# Altium PCB PCB2.PcbDoc
Units mil, origin at the board's own origin, x right, y up, seen from the top; angles counter-clockwise.
Board outline 1149.6 x 672.48 mil, 4 copper layers (Component Side, Ground Plane, Power Plane, Solder Side), stack 33.234 mil thick; 48 components, 45 nets, 195 pads, 94 vias.
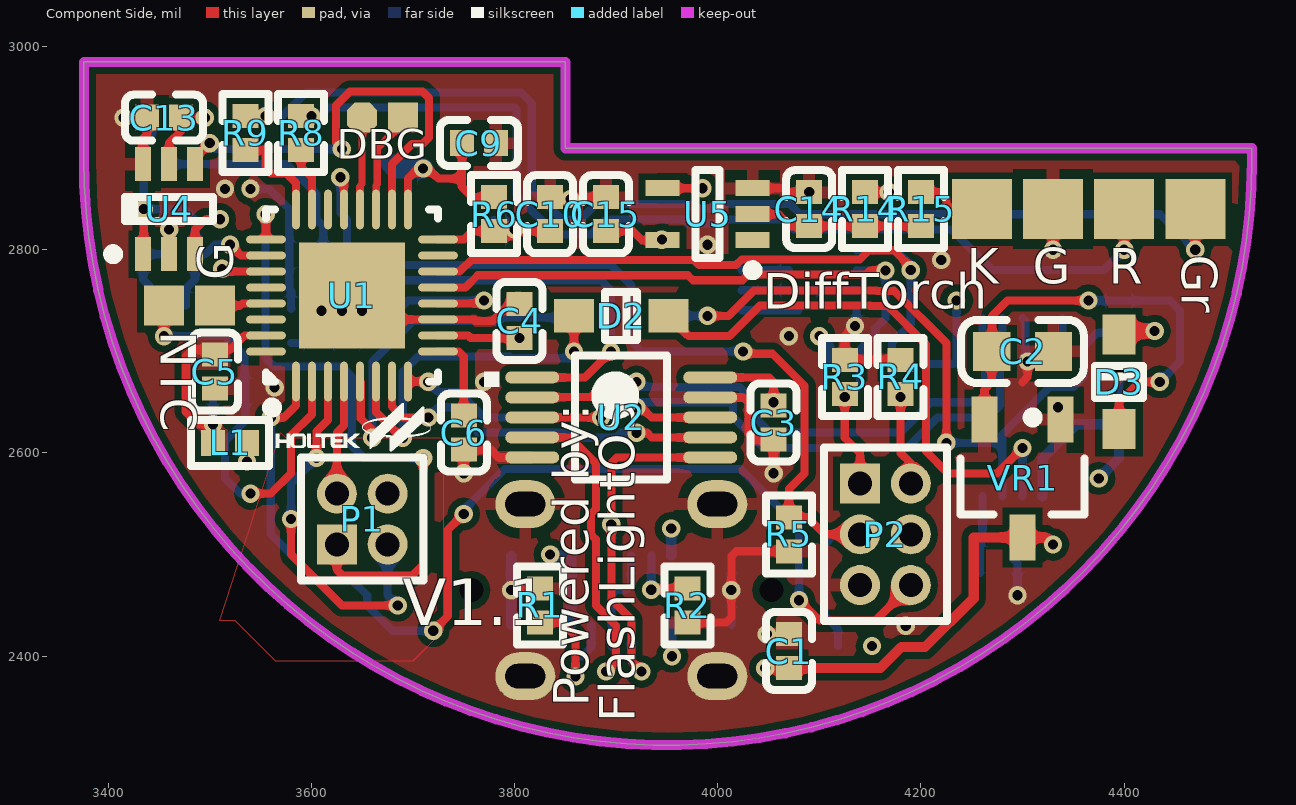
[diagram p0: Component Side view]
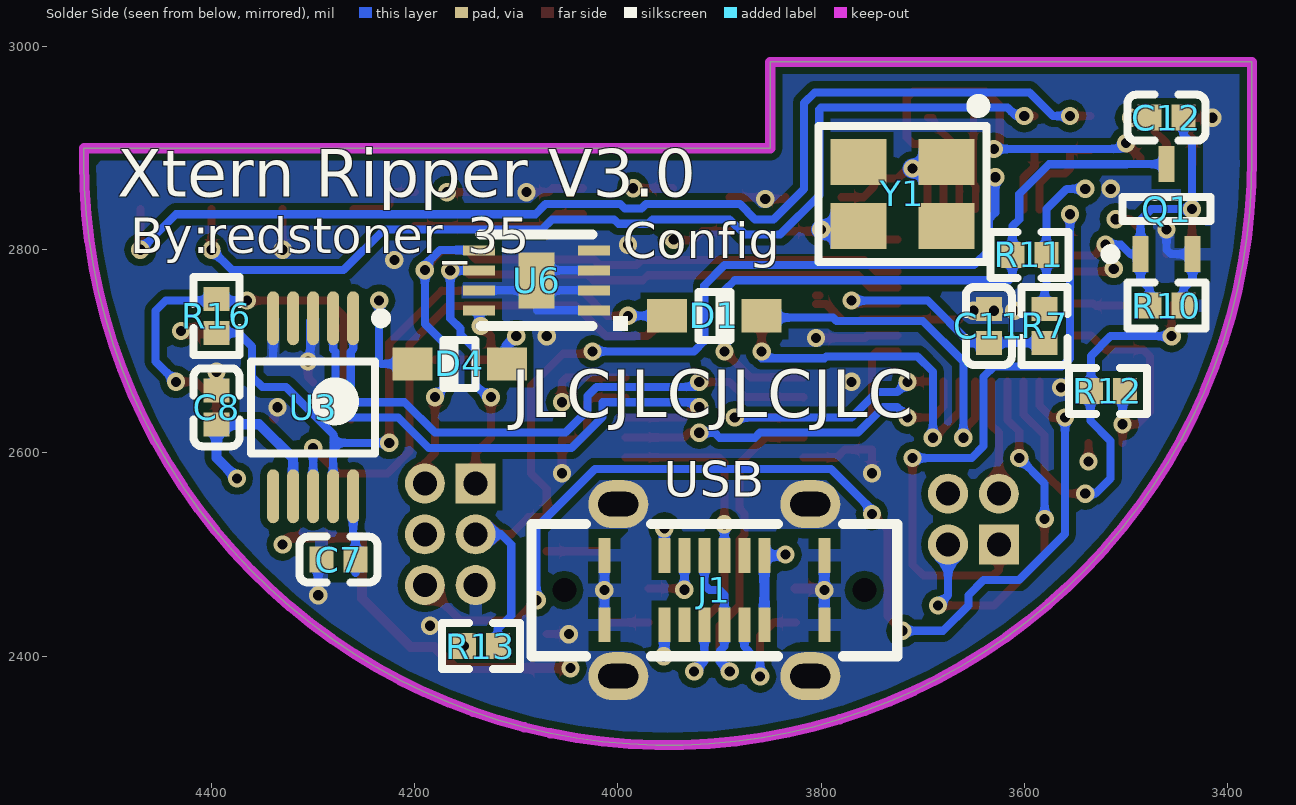
[diagram p1: Solder Side view, seen from below]
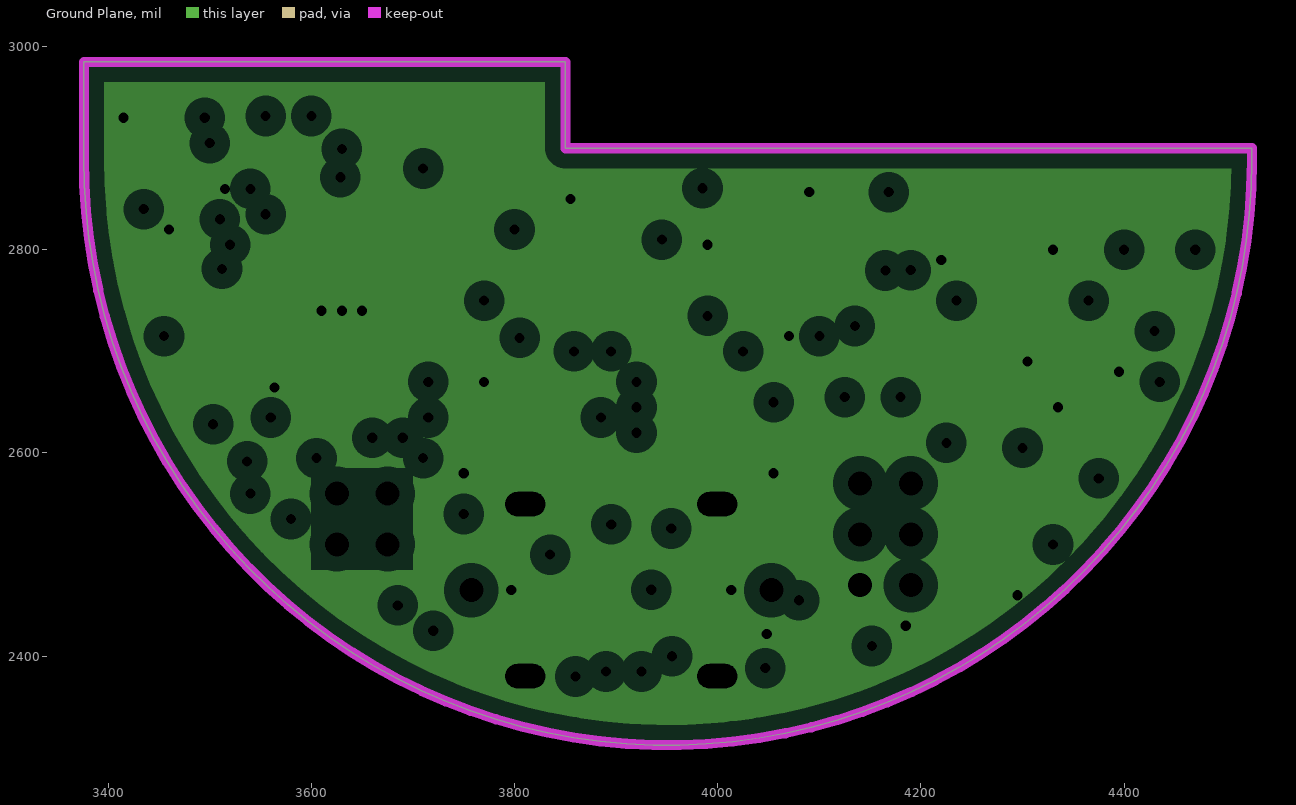
[diagram p2: Ground Plane, clearances drawn from the general rule]
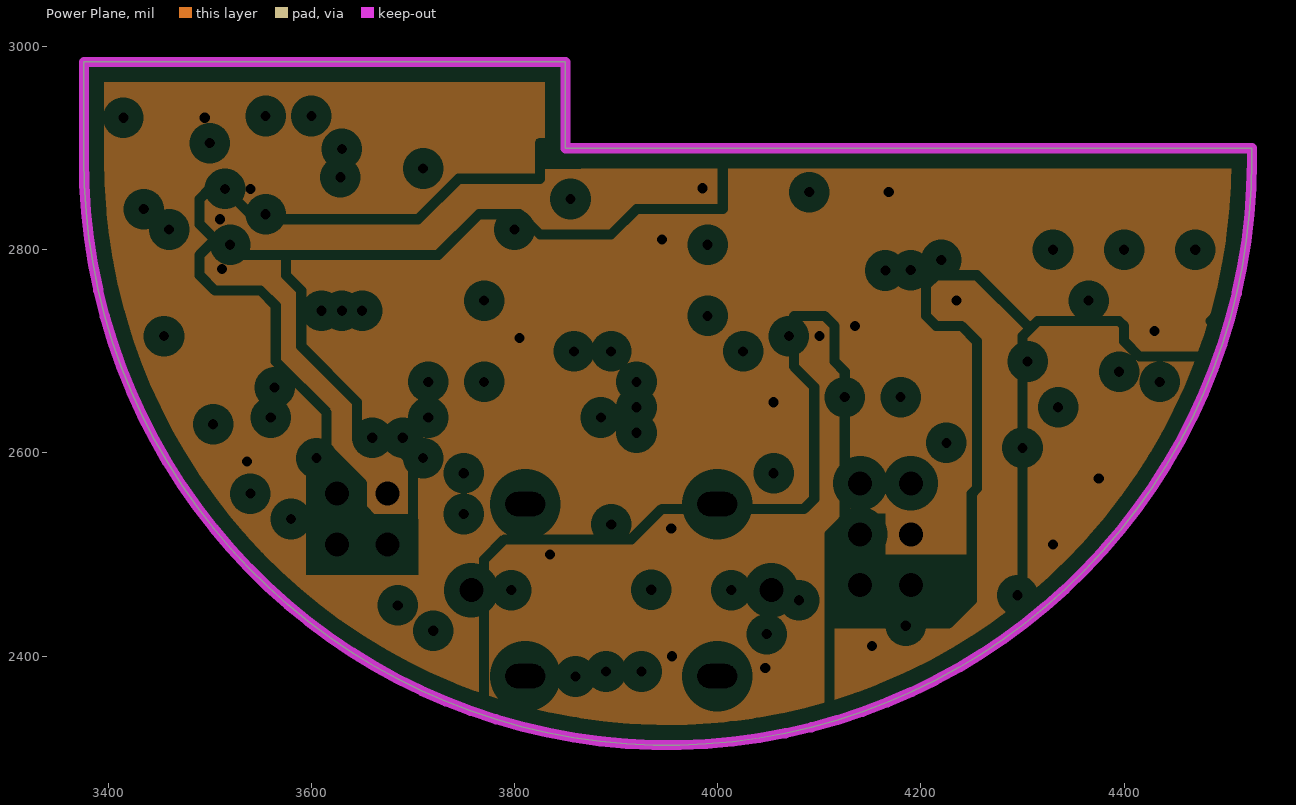
[diagram p3: Power Plane, clearances drawn from the general rule]
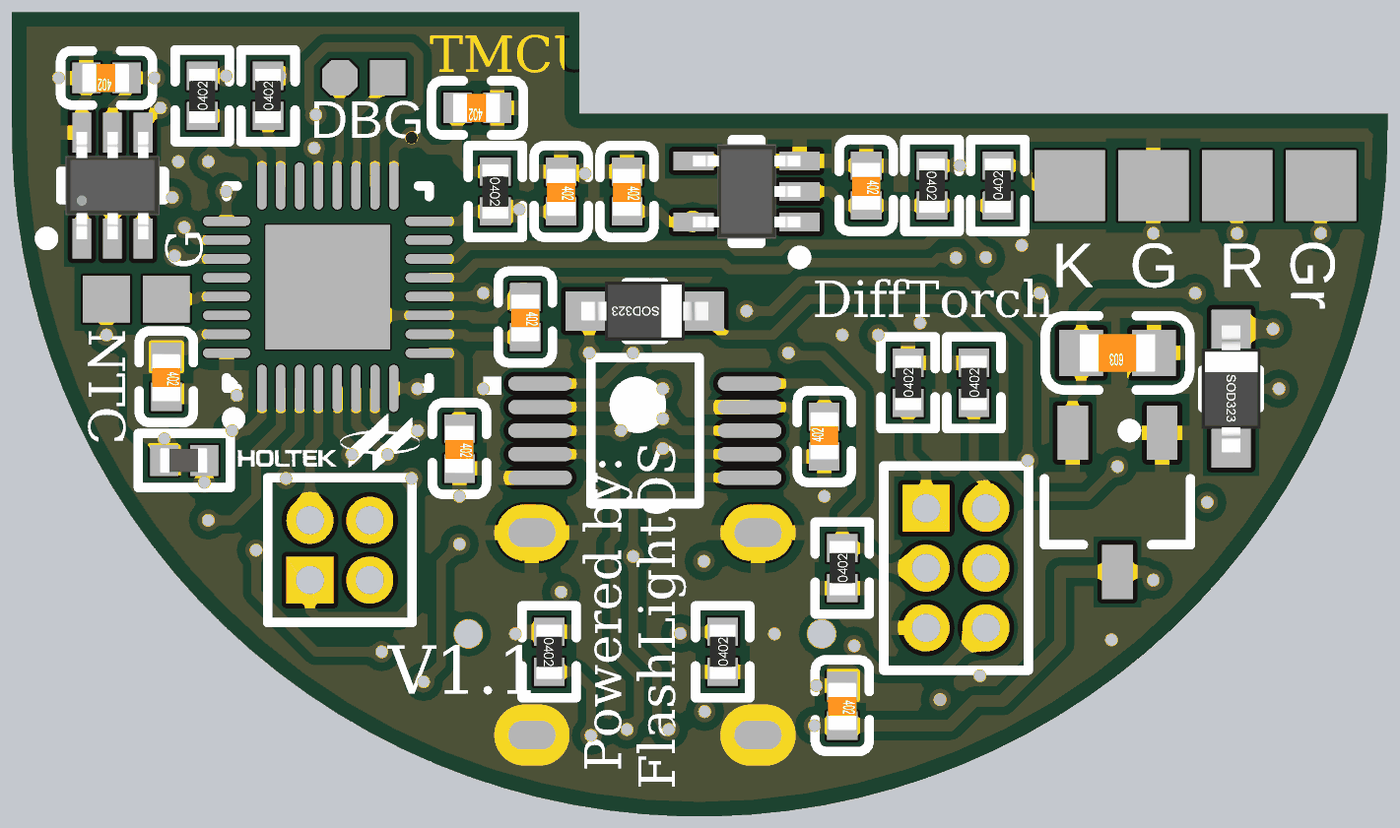
[diagram p4: 3D render of the assembled board from above, using the file's embedded part models]
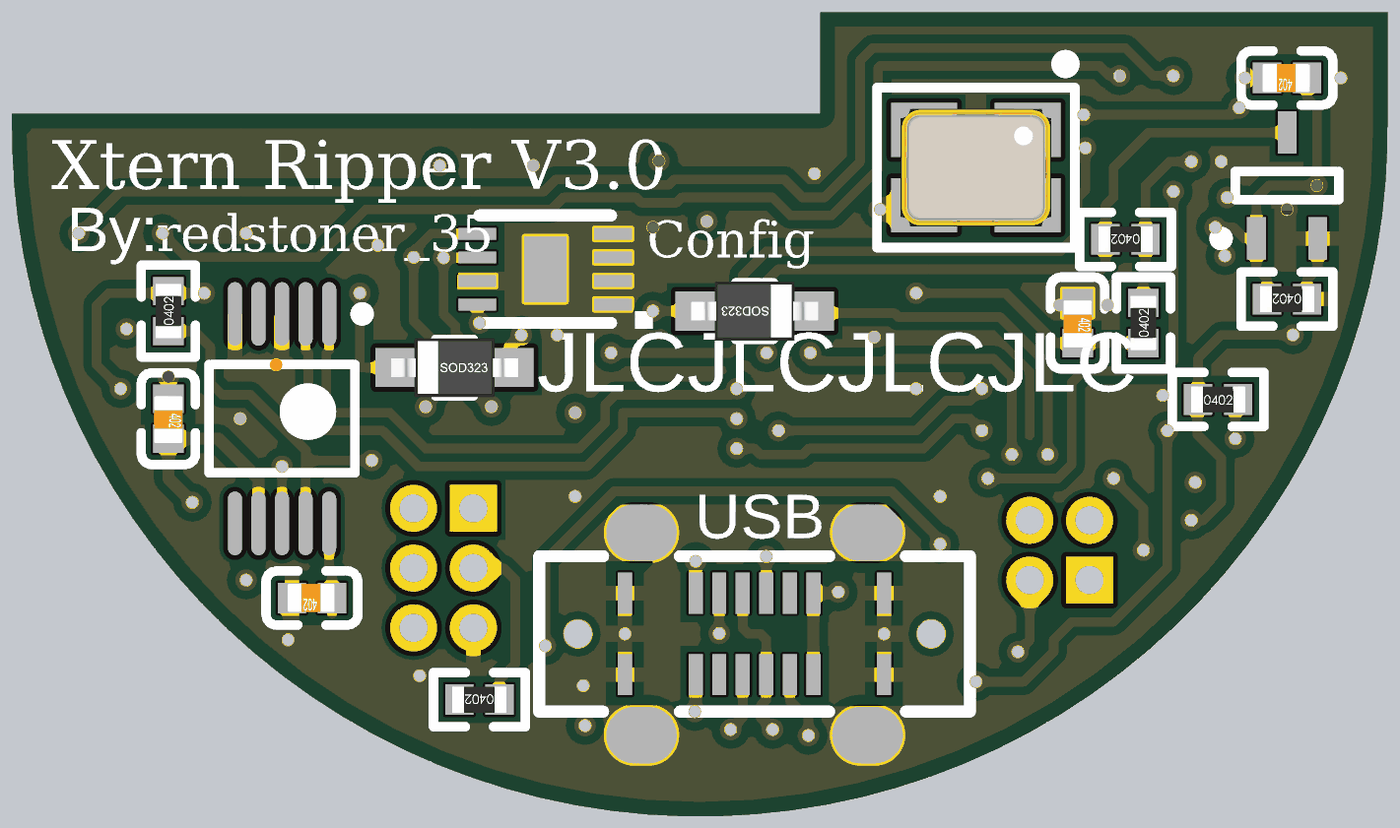
[diagram p5: 3D render of the assembled board from below, using the file's embedded part models]

## Layer stack, top to bottom
Top Solder: solder mask 0.4, Solder Resist, Dk 3.5
Component Side: signal copper 1.4
Dielectric 1: core 12.6, FR-4, Dk 4.8
Ground Plane: plane copper 1.417
Dielectric 3: prepreg 5, Dk 4.2
Power Plane: plane copper 1.417
Dielectric 4: core 10, Dk 4.2
Solder Side: signal copper 1.4
Bottom Solder: solder mask 0.4, Solder Resist, Dk 3.5

## Board outline
3376.06,2889.99 ccw(c3950.86,2887.2) 4525.66,2887.2 4525.66,2900 3850.07,2900 3850.07,2985 3376.06,2985

## Design rules (kind name [scope] priority, off if disabled: settings)
Clearance [All] p1: gap=7
DiffPairsRouting [All] p1: maxlimit=8 minlimit=7 mostfreqgap=7 toplayer_minwidth=8 toplayer_maxwidth=9 toplayer_prefwidth=8 bottomlayer_minwidth=8 bottomlayer_maxwidth=9 bottomlayer_prefwidth=8 maxuncoupledlength=500
PlaneClearance [All] p1: clearance=15
PlaneConnect [All] p1: planeconnectstyle=Direct reliefexpansion=20 reliefentries=4 reliefconductorwidth=10 reliefairgap=10
PolygonConnect PolygonConnect_1 [IsVia] p1: connectstyle=Direct reliefconductorwidth=10 reliefentries=4 polygonreliefangle="90 Angle" airgapwidth=10
PolygonConnect [All] p2: connectstyle=Relief reliefconductorwidth=12 reliefentries=4 polygonreliefangle="90 Angle" airgapwidth=10
RoomDefinition main [InComponentClass('main')] p1: confinementstyle=ConfineIn formatcopy=TRUE lockcomponents=FALSE outline 0,0 2000,0 2000,1000 0,1000
RoutingVias [All] p1: holewidth=28 width=50 viastyle="Through Hole" minholewidth=28 minwidth=50 maxholewidth=28 maxwidth=50
SolderMaskExpansion [All] p1: expansion=4
Width [All] p1: maxlimit=200 minlimit=7 preferedwidth=10
27 further rules are at their usual default settings.

## Classes and differential pairs
differential pair USB: +USB_P -USB_N
differential pair MCUUSB: +MCUUSB_P -MCUUSB_N
differential pair UARTUSB: +UARTUSB_P -UARTUSB_N

## Components (designator, comment, footprint, x,y, rotation, side; value= is the part's Value field where it differs from the comment)
C1 "100nF (104) 10% 16V" 0402_C 4070,2405 r270 top
C2 "10uF (106) 10% 10V" 0603_C 4300,2700 r180 top
C3 "100nF (104) 10% 16V" 0402_C 4055,2630 r90 top
C4 "100nF (104) 10% 16V" 0402_C 3805,2730 r270 top
C5 "100nF (104) 10% 16V" 0402_C 3505,2680 r270 top
C6 "4.7uF (475) 20% 10V" 0402_C 3750,2620 r270 top
C7 "4.7uF (475) 20% 10V" 0402_C 4275,2495 r0 bottom
C8 "100nF (104) 10% 16V" 0402_C 4395,2645 r270 bottom
C9 "15pF (150) 5% 50V" 0402_C 3765,2905 r180 top
C10 "15pF (150) 5% 50V" 0402_C 3835,2835 r270 top
C11 "1.0uF (105) 10% 25V" 0402_C 3635,2725 r270 bottom
C12 "470nF (474) 10% 10V" 0402_C 3460,2930 r0 bottom
C13 "100nF (104) 10% 16V" 0402_C 3455,2930 r180 top
C14 "470nF (474) 10% 10V" 0402_C 4090,2840 r270 top
C15 "100nF (104) 10% 16V" 0402_C 3890,2835 r270 top
D1 "1N4148WS T4" SOD-323 3905,2735 r0 bottom
D2 "1N4148WS T4" SOD-323 3905,2735 r180 top
D3 "1N5819W S4" SOD-323 4395,2670 r270 top
D4 "1N4148WS T4" SOD-323 4155.86,2687.71 r180 bottom
J1 "Typec-303-ACP16" USB-C-SMD_TYPEC-303-ACP16 3905.07,2465 r0 bottom locked
L1 "500Ω 5%" 0402_L 3520,2610 r180 top
P1 "1.27mm 2P双排针" MHDR2X2 3625.07,2510 r0 top locked
P2 "1.27mm 3P双排针" MHDR2X3 4140.07,2570 r270 top locked
Q1 "2N7002KW" SC70-3 3460,2840 r90 bottom
R1 "5.1KΩ (5101) ±1%" 0402_R 3825,2450 r270 top
R2 "5.1KΩ (5101) ±1%" 0402_R 3970,2450 r90 top
R3 "3.3KΩ (3301) ±1%" 0402_R 4125,2675 r90 top
R4 "3.3KΩ (3301) ±1%" 0402_R 4180,2675 r90 top
R5 "10KΩ (1002) ±1%" 0402_R 4070,2520 r90 top
R6 "1MΩ (1004) ±1%" 0402_R 3780,2835 r270 top
R7 "82KΩ (8202) ±1%" 0402_R 3580,2725 r90 bottom
R8 "22Ω (22R0) ±1%" 0402_R 3590,2915 r90 top
R9 "22Ω (22R0) ±1%" 0402_R 3535,2915 r90 top
R10 "82KΩ (8202) ±1%" 0402_R 3460,2745 r0 bottom
R11 "82KΩ (8202) ±1%" 0402_R 3595,2795 r0 bottom
R12 "10KΩ (1002) ±1%" 0402_R 3517.64,2661.03 r180 bottom
R13 "2.7KΩ (2701) ±1%" 0402_R 4135,2410 r0 bottom
R14 "15KΩ (1502) ±1%" 0402_R 4145,2840 r270 top
R15 "1KΩ (1001) ±1%" 0402_R 4200,2840 r90 top
R16 "10KΩ (1002) ±1%" 0402_R 4395,2735 r90 bottom
U1 "HT32F52352-QFN" QFN32-HT32 3640,2755 r90 top locked
U2 "TS3USB30E/CH442E" MSOP-10 3905,2635 r0 top locked
U3 "CH340E" MSOP-10 4300,2645 r270 bottom
U4 "SN74LVC1G373DCKR" DCK0006A_N 3460,2840 r90 top
U5 "SN74LVC1G17DCKR" DCK0005A_N 3990,2835 r180 top
U6 "FM24C512D-UD-T-G" UDFN-8 4080,2770 r0 bottom
VR1 "XC6206P332MR" SOT-23-3L 4300,2575 r90 top locked
Y1 "8MHZ 20PF 10PPM" SMD-3225_4P 3720,2855 r0 bottom locked

## Footprints (in the part's own frame and the unit in brackets; to place one, negate y for a bottom-side part, rotate by r counter-clockwise, add the part's x,y. Pads: shape width x height; smd on the part's side, far side on the other; paste and mask are expansions set on the pad)
0402_C [mm]
  rect 0.6x0.65 smd mask+0.051: 1(-0.425,0) 2(0.425,0)
  silkscreen extent -0.97,-0.58 0.97,0.58, body extent -0.48,-0.3 0.52,0.3, height 0.2
0402_L [mm]
  rect 0.6x0.65 smd mask+0.051: 1(-0.425,0) 2(0.425,0)
  silkscreen extent -0.97,-0.58 0.97,0.58, body extent -0.51,-0.26 0.54,0.26, height 0.36
0402_R [mm]
  rect 0.6x0.65 smd mask+0.051: 1(-0.425,0) 2(0.425,0)
  silkscreen extent -0.97,-0.58 0.97,0.58, body extent -0.57,-0.27 0.58,0.28, height 0.41
0603_C [mm]
  rect 0.93x0.98 smd: 1(-0.77,0) 2(0.77,0)
  silkscreen extent -1.53,-0.79 1.54,0.79, body extent -0.8,-0.4 0.8,0.4, height 0.3
DCK0005A_N [mm] "SOT23, 5-Leads, Body 2.15x1.4mm, Pitch 0.65mm, IPC Medium Density"
  rect 0.85x0.4 smd: 1(-1.125,0.65) 2(-1.125,0) 3(-1.125,-0.65) 4(1.125,-0.65) 5(1.125,0.65)
  silkscreen extent -1.25,-1.1 0.3,1.52, body extent -1.14,-1 1.14,1, height 1.1
DCK0006A_N [mm] "SOT23, 6-Leads, Body 2.15x1.4mm, Pitch 0.65mm, IPC Medium Density"
  rect 0.85x0.4 smd: 1(-1.125,0.65) 2(-1.125,0) 3(-1.125,-0.65) 4(1.125,-0.65) 5(1.125,0) 6(1.125,0.65)
  silkscreen extent -1.25,-1.1 0.3,1.52, body extent -1.14,-1 1.14,1, height 1.1
MHDR2X2 [mm] "Connector; Header; 2x2 Position"
  rect 1x1 hole 0.6: 1(0,0)
  round 1 hole 0.6: 2(0,1.27) 3(1.27,0) 4(1.27,1.27)
  silkscreen extent -0.9,-0.9 2.17,2.17
MHDR2X3 [mm] "Connector; Header; 3x2 Position"
  rect 1x1 hole 0.6: 1(0,0)
  round 1 hole 0.6: 2(0,1.27) 3(1.27,0) 4(1.27,1.27) 5(2.54,0) 6(2.54,1.27)
  silkscreen extent -0.9,-0.9 3.44,2.17
MSOP-10 [mm] "TSSOP, 10-Leads, Body 3.00x3.00mm, Pitch 0.50mm, IPC Medium Density"
  oval 1.35x0.3 smd: 1(-2.225,1) 2(-2.225,0.5) 3(-2.225,0) 4(-2.225,-0.5) 5(-2.225,-1) 6(2.225,-1) 7(2.225,-0.5) 8(2.225,0) 9(2.225,0.5) 10(2.225,1)
  silkscreen extent -1.15,-1.55 1.15,1.55, body extent -1.55,-1.55 1.55,1.55, height 1.1
QFN32-HT32 [mm] "QFN, 32-Leads, Body 4.00x4.00mm, Pitch 0.40mm, Thermal Pad 2.65x2.65mm, IPC Low Density"
  oval 1x0.2 smd mask+0.03: 1(-2.15,1.4) 2(-2.15,1) 3(-2.15,0.6) 4(-2.15,0.2) 5(-2.15,-0.2) 6(-2.15,-0.6) 7(-2.15,-1) 8(-2.15,-1.4) 17(2.15,-1.4) 18(2.15,-1) 19(2.15,-0.6) 20(2.15,-0.2) 21(2.15,0.2) 22(2.15,0.6) 23(2.15,1) 24(2.15,1.4)
  oval 0.2x1 smd mask+0.03: 9(-1.4,-2.15) 10(-1,-2.15) 11(-0.6,-2.15) 12(-0.2,-2.15) 13(0.2,-2.15) 14(0.6,-2.15) 15(1,-2.15) 16(1.4,-2.15) 25(1.4,2.15) 26(1,2.15) 27(0.6,2.15) 28(0.2,2.15) 29(-0.2,2.15) 30(-0.6,2.15) 31(-1,2.15) 32(-1.4,2.15)
  rect 2.65x2.65 smd mask+0.03: 33(0,0)
  silkscreen extent -2.92,-2.15 2.15,2.15, body extent -2,-2 2,2, height 0.8
SC70-3 [mm] "3 Lead SC70(SOT-323) package for small Transistor"
  rect 0.9x0.4 smd mask+0.05: 1(-1.125,0.65) 2(-1.125,-0.65) 3(1.125,0)
  silkscreen extent -1.25,-1.1 0.3,1.53, body extent -0.67,-1.1 0.67,1.1, height 1.1
SMD-3225_4P [mm]
  rect 1.4x1.15 smd: 1(-1.1,-0.8) 2(1.1,-0.8) 3(1.1,0.8) 4(-1.1,0.8)
  silkscreen extent -2.1,-2.35 2.1,1.7, body extent -1.6,-1.25 1.6,1.25, height 0.61
SOD-323 [mm]
  rect 1x0.83 smd: 1(1.18,0) 2(-1.18,0)
  silkscreen extent -0.4,-0.6 0.4,0.6, body extent -1.35,-0.62 1.35,0.62, height 1.1
SOT-23-3L [mm] "http://www.aosmd.com/res/packaging_information/SOT-23-3L.pdf"
  rect 1.15x0.65 smd: 1(1.475,-0.95) 2(1.475,0.95) 3(-1.475,0)
  silkscreen extent -0.9,-1.55 1.65,1.55, body extent -0.9,-1.55 0.9,1.55, height 1.25
UDFN-8 [mm] "SON, 8-Leads, Body 2.00x3.00mm, Pitch 0.50mm, Thermal Pad 1.40x0.90mm, IPC Medium Density"
  rect 0.8x0.25 smd mask+0.05: 1(-1.44,0.75) 2(-1.44,0.25) 3(-1.44,-0.25) 4(-1.44,-0.75) 5(1.44,-0.75) 6(1.44,-0.25) 7(1.44,0.25) 8(1.44,0.75)
  rect 0.9x1.4 smd mask+0.05: 9(0,0)
  silkscreen extent -2.1,-1.14 1.4,1.14, body extent -1.5,-1 1.5,1, height 0.55
USB-C-SMD_TYPEC-303-ACP16 [mm]
  rect 0.1x0.1 hole 0.6 mask+0.05: 0(-3.75,0) 0(3.75,0)
  oval 1.5x1.2 hole 0.61 slot 1 at 0 deg mask+0.051: 1(-2.4,-2.15) 1(-2.4,2.15) 1(2.4,-2.15) 1(2.4,2.15)
  rect 0.3x0.87 smd paste-100 mask+0.051: A1(-2.75,0.865) A4(-1.25,0.865) A5(-0.75,0.865) A6(-0.25,0.865) A7(0.25,0.865) A8(0.75,0.865) A9(1.25,0.865) A12(2.75,0.865) B1(2.75,-0.865) B4(1.25,-0.865) B5(0.75,-0.865) B6(0.25,-0.865) B7(-0.25,-0.865) B8(-0.75,-0.865) B9(-1.25,-0.865) B12(-2.75,-0.865)
  silkscreen extent -4.57,-1.65 4.57,1.65

## Part data
C1 C3 C4 C5 C8 C13 C15: library part "0402 100nF (104) 10% 16V", "贴片电容"
C2: library part "0603 10uF (106) 10% 10V", "贴片电容"
C6 C7: library part "0402 4.7uF (475) 20% 10V", "贴片电容"
C9 C10: library part "0402 15pF (150) 5% 50V", "贴片电容"
C11: library part "0402 1.0uF (105) 10% 25V", "贴片电容"
C12 C14: library part "0402 470nF (474) 10% 10V", "贴片电容"
D1 D2 D3 D4: library part "SOD-323 1N4148WS T4", "二极管"
J1: library part Type-303-ACP16, "16Pin TypeC 立贴母座"
L1: library part "0402 10nH 5%", "贴片磁珠"
P1: library part MHDR2X2, "Header, 2-Pin, Dual row"
P2: library part MHDR2X3, "Header, 3-Pin, Dual row"
Q1: library part "2N7002 7002", "MOS(场效应管)"
R1 R2: library part "0402 5.1KΩ (5101) 1%", "贴片电阻"
R3 R4 R13: library part "0402 3.3KΩ (3301) 1%", "贴片电阻"
R5 R12 R16: library part "0402 10KΩ (1002) 1%", "贴片电阻"
R6: library part "0402 1MΩ (1004) 1%", "贴片电阻"
R7 R10: library part "0402 68KΩ (6802) 1%", "贴片电阻"
R8 R9: library part "0402 22Ω (22R0) 1%", "贴片电阻"
R11: library part "0402 100KΩ (1003) 1%", "贴片电阻"
R14: library part "0402 15KΩ (1502) 1%", "贴片电阻"
R15: library part "0402 1KΩ (1001) 1%", "贴片电阻"
U1: "Holtek MCU Cortex M0+ 48MHz 128K ROM 16K RAM"
U2: library part TS3USB30E, "Passive SPDT USB2.0 Highspeed switch"
U3: "USB-TTL UART converter MSOP-10"
U4: "Single D-Type Latch with 3S Output, DCK0006A, LARGE T&R"
U5: "Single Schmitt-Trigger Buffer, DCK0005A, LARGE T&R"
U6: library part CAT24C512HU5, "512Kbit 24Serires I2C EEPROM UDFN-8 with UID and OTP Sector"
VR1: library part "SOT-23 XC6206P332MR", "低压差线性稳压(LDO)"
Y1: library part "SMD-3225_4P  12MHZ 20PF 10PPM", "贴片晶振"

## Free pads (board coordinates)
  rect 39.37x39.37 smd mask+1.97: 0(3505,2745) 1(3455,2745)
  rect 59.06x59.06 smd mask+1.97: 2(4260,2840) 4(4330,2840) 5(4470,2840) 6(4400,2840)
  rect 29.53x29.53 smd mask+1.97: 7(3690,2930)
  oct 29.53x29.53 smd mask+1.97: 8(3650,2930)

## Via types
v1: diameter 18, hole 10, Component Side to Solder Side, tented both sides, 94 vias

## Nets (pads, with @x,y where several pads share a name; then routed paths per layer and width w, separated by ;. In a path a pad name is that pad's centre, name@x,y a point inside that pad or via, vN(x,y) a via of type N, cw(c..) or ccw(c..) an arc to the next point about the centre after c; other vN are vias at no path point)
3V3: C3.2 C4.2 C12.2 C13.1 C15.2 D3.2 L1.1 P2.4 R3.2 R4.2 R7.2 R11.1 R14.1 U1.10 U2.10 U4.5 U5.5 U6.8 | length 662.7
  Component Side w8: U4.5 3460,2905 3471.73,2916.73 C13.1 v1(3495,2930) ; v1(3536.73,2591.73) L1.1 ; U1.10 3754.37,2715.63 ; 3755,2715 3756.73,2713.27 v1(3805,2713.27) ; C15.2 3916.73,2818.27 3925.59,2809.41 U5.5 ; U2.10 4050.63,2674.37 4055,2670 C3.2 4051.73,2650 v1(4055,2650) ; v1(4135,2725) 4125,2715 R3.2 R4.2 ; R14.1 v1(4168.27,2856.73)
  Component Side w15: D3.2 4398.54,2720 v1(4430,2720)
  Solder Side w8: C12.2 v1(3495,2930) ; v1(3540,2860) 3558.28,2860 3578.27,2840.02 R11.1 3578.27,2761.73 3580,2760 R7.2 R7.2@3580.5,2742.23 ; v1@4136.69,2721.69 U6.8
  other v1: 3945,2810
5V: C1.2 C8.2 D4.1 J1.A4 J1.A9 J1.B4 J1.B9 U3.7 VR1.3 | length 752
  Component Side w10: v1(4046.73,2388.27) C1.2 C1.2 4160,2388.3 4180.7,2409 4204,2409 4251.93,2456.93 4251.93,2516.93 VR1.3 4323.07,2516.93 v1(4330,2510)
  Solder Side w10: v1@3835.94,2499.06 J1.B9 J1.A4 ; v1@3954.28,2400.72 J1.A9 ; J1.B4 v1(3954.28,2525.72) ; v1(4100,2715) 4109.41,2705.59 D4.1 ; U3.7 4319.69,2594.68 4353.27,2628.27 C8.2 ; v1(4375,2575) 4395,2595 C8.2 ; 4395,2615 C8.2
  other v1: 3955,2400 3835,2500
A3V3: C5.1 L1.2 R12.2 U1.31 | length 225.7
  Component Side w8: L1.2 v1(3503.27,2628.27) 3488.79,2628.27 3476.43,2640.63 3476.43,2694.89 3483.27,2701.73 3505,2701.73 3520.33,2701.73 3534.23,2715.63 U1.31
  Solder Side w8: R12.2 3503.27,2658.66 v1(3503.27,2628.27)
BOOT: U1.18 U4.4 | length 434.7
  Component Side w8: U4.4 3485.59,2890.59 v1(3500,2905) ; v1(3630,2899.24) 3630,2900 3624.24,2905.76 3624.24,2941.94 3638.06,2955.76 3709.32,2955.76 3715.76,2949.32 3715.76,2910.68 3709.32,2904.24 3699.24,2904.24 3679.37,2884.37 U1.18
  Solder Side w8: v1(3500,2905) 3505.76,2899.24 v1(3630,2899.24)
CH3V3: C7.1 U3.10 | length 76.6
  Solder Side w8: 4258.27,2481.73 C7.1 4258.27,2518.27 4260.63,2520.63 U3.10
DCDCEN: P1.4 U1.27 | length 44.4
  Component Side w8: v1(3511.99,2781.21) 3514.58,2778.62 U1.27
GND: C1.1 C2.1 C3.1 C4.1 C5.2 C6.2 C7.2 C8.1 C9.1 C10.1 C11.1 C13.2 C14.1 C15.1 J1.1 J1.A1 J1.A12 J1.B1 J1.B12 P2.5 pad.4 Q1.2 R1.1 R2.1 R5.1 R10.1 U1.11 U1.32 U1.33 U2.5 U2.9 U3.3 U3.5 U4.2 U4.6 U5.3 U6.1 U6.2 U6.3 U6.4 U6.7 U6.9 VR1.1 | length 1449.4
  Component Side w8: v1(3415,2930) C13.2 3438.27,2913.27 3434.41,2909.41 U4.6 ; U4.2 v1(3460,2820) ; C5.2@3505,2668.27 3503.27,2670 C5.2@3505,2670 ; U1.33@3663.62,2731.38 U1.11 3760.34,2731.38 3761.72,2730 3778.28,2730 3795.02,2746.73 C4.1 ; v1(3750,2580) C6.2 3776.73,2603.27 3784.37,2595.63 U2.5 ; C4.1@3801.73,2755 C4.1@3805,2755 ; C10.1 3836.73,2850 v1(3855,2850) ; v1@3856.73,2851.73 C15.1 ; R2.1 4008.27,2433.27 4013.34,2438.34 v1(4013.34,2465) 4013.34,2498.34 4018.27,2503.27 R5.1 ; U2.9 4025.31,2654.69 4030.17,2649.83 4030.17,2619.83 4036.73,2613.27 C3.1 v1(4055,2580) ; U5.3 4064.41,2860.59 4068.27,2856.73 v1(4090,2856.73) ; v1(4048.27,2421.73) C1.1 ; 4300,2669.68 4305,2674.68 v1(4305,2690) ; v1(4330,2800) pad.4 ; v1(4335,2645) 4335,2639.33 4339.33,2635 VR1.1
  Component Side w10: v1(3796.8,2465.01) 3798.53,2466.73 R1.1
  Solder Side w8: R10.1 3443.27,2761.73 3434.41,2770.59 Q1.2 3455.71,2795.71 3460,2800 v1(3460,2820) ; J1.A12 v1(4013.34,2465) J1.B1 ; U6.1 4079.53,2740.47 ; U6.2 U6.9@4070.16,2760.16 ; U6.3 U6.9@4070.16,2779.84 ; U6.9@4089.84,2760.16 U6.7 ; C7.2 4295,2491.73 v1(4295,2460) ; U3.3 4302.78,2729.82 4302.78,2692.22 v1(4305,2690) ; 4339.37,2695.65 U3.5 ; C8.1 v1(4395,2680)
  Solder Side w10: J1.A1 v1(3796.8,2465.01) J1.B12
  other v1: 4185,2430 3563.89,2664.47 3770,2670 4070,2715 3610,2740 3630,2740 3650,2740 4220,2790 3990,2805 3515,2860
GR: pad.5 R9.2 | length 1114.4
  Component Side w8: R9.2 v1(3555,2931.73) ; v1(4470,2800) pad.5
  Solder Side w8: v1(3555,2931.73) 3571.72,2931.73 3594.98,2955 3806.21,2955 3816.87,2944.35 3816.87,2859.85 3846.72,2830 3865,2830 3880,2845 3972.31,2845 3976.72,2840.59 3993.28,2840.59 3997.69,2845 4071.21,2845 4081.21,2835 4435,2835 v1(4470,2800)
GRLED: R9.1 U1.24 | length 100.1
  Component Side w8: R9.1 3555,2898.27 3555,2880 3560,2875 3575.5,2875 3584.88,2865.62 U1.24
KEYI: U4.3 U5.4 | length 92.1
  Component Side w8: U4.3 3485.59,2820 3495.59,2830 v1(3510,2830) ; U5.4 v1(3985,2860.59)
KEYIN: pad.2 R15.2 | length 69.9
  Component Side w8: R15.2 4218.27,2856.73 4225,2850 4225,2845 4230,2840 pad.2
KEYLOCK: C12.1 Q1.1 R10.2 U1.26 U4.1 | length 358.2
  Component Side w8: U4.1@3435,2796.3 v1(3435,2840) ; v1(3520,2805) 3530.63,2794.37 U1.26
  Solder Side w8: C12.1 3443.27,2913.27 3435,2905 v1(3435,2840) 3475,2840 3485.59,2829.41 Q1.1 ; R10.2 3476.73,2761.73 3485.59,2770.59 Q1.1 ; v1(3520,2805) 3505,2805 3495.71,2795.71 Q1.1
LEDEN: P1.1 U1.25 | length 623.8
  Component Side w8: U1.25 v1@3555.35,2834.65 ; P1.1 3625.07,2484.93 3630.69,2479.31 3699.31,2479.31 3710,2490 v1(3710,2595)
  Solder Side w8: v1(3555,2835) 3555,2693.11 3563.11,2685 3630,2685 3640,2675 3640,2606.72 3651.72,2595 v1(3710,2595)
LEDI: P1.3 U1.3 | length 370.2
  Component Side w8: v1@3580,2530 3580,2500 3630,2450 v1(3685,2450) ; v1(3605,2595) 3605,2621.21 3616.38,2632.59 U1.3
  Solder Side w8: v1(3580,2535) 3580,2570 v1(3605,2595) ; P1.3 3675.07,2459.93 v1(3685,2450)
LEDVF: P2.6 U1.1 | length 1080
  Component Side w8: v1(3560,2635) 3573.21,2635 3584.88,2646.67 U1.1 ; v1(3720,2425) 3734.62,2439.62 3734.62,2524.62 v1(3750,2540) ; v1(4080,2455) 4100,2435 4155.07,2435 P2.6
  Solder Side w8: v1(3560,2635) 3560,2520.15 3605.15,2475 3640,2475 3655,2460 3655,2450 3680,2425 v1(3720,2425) ; v1(3750,2540) 3750,2543.94 3790.34,2584.27 4022.44,2584.27 4080,2526.72 v1(4080,2455)
MCUUSB_N: U1.7 U2.7 | length 367.9
  Component Side w8: U1.7 3679.37,2645.63 3690,2635 v1(3715,2635) ; v1(3920,2620) 3930.32,2620 3935,2615.32 U2.7
  Solder Side w8: v1(3715,2635) 3725,2645 3738.79,2645 3763.79,2620 3860,2620 3865,2615 3900,2615 3905,2620 v1@3925,2620
MCUUSB_P: U1.8 U2.3 | length 271.6
  Component Side w8: U1.8 v1@3714.65,2670.35 ; U2.3 v1(3885,2635)
  Solder Side w8: v1(3715,2670) 3725,2660 3745,2660 3770,2635 v1(3885,2635)
NetC6_1: C6.1 U1.9 | length 85.6
  Component Side w8: U1.9 3745.12,2699.88 3750,2695 C6.1
NetC14_2: C14.2 R14.2 R15.1 U5.2 | length 170.6
  Component Side w8: U5.2 4060,2835 4071.73,2823.27 C14.2 R14.2 R15.1
NetD4_2: D4.2 R13.2 | length 93.6
  Solder Side w8: D4.2 4232.71,2687.71 4235,2690 v1(4235,2750)
  other v1: 4151.73,2410
NetJ1_A5: J1.A5 R1.2 | length 141.6
  Component Side w8: R1.2 3846.73,2433.27 3860,2420 v1(3860,2380)
  Solder Side w8: v1(3860,2380) 3860,2400 3866.27,2400 3875.54,2409.27 J1.A5
NetJ1_B5: J1.B5 R2.2 | length 67.7
  Component Side w8: v1@3935.94,2466.73 R2.2
  Solder Side w8: v1(3934.6,2465.4) J1.B5
NTC: pad.1 R12.1 U1.2 | length 438.7
  Component Side w8: v1(3455,2715) pad.1 ; v1(3540,2560) 3560,2560 3580,2580 3580,2617.43 3600.63,2638.06 U1.2
  Solder Side w8: v1(3455,2715) 3515,2715 3534.37,2695.63 R12.1 ; 3535,2675 3535,2631.72 3515,2611.72 3515,2575 3530,2560 v1(3540,2560)
PWMDIM: P2.3 R5.2 R13.1 U1.21 | length 1003.5
  Component Side w8: v1(3628.56,2871.44) 3632.13,2867.87 U1.21 ; v1(4025,2700) 4027.3,2697.7 4054.05,2697.7 4085.52,2666.23 4085.52,2580 4070,2564.48 R5.2 4088.27,2536.73 4105,2520 P2.3
  Solder Side w8: v1(3628.56,2871.44) 3628.56,2836.44 3635,2830 3635,2799.44 3649.44,2785 3895,2785 3915,2765 3915,2710 3925,2700 v1(4025,2700) ; R13.1 4118.27,2426.73 4105,2440 4105,2510 4115,2520 P2.3
RED: pad.6 R8.2 | length 993.6
  Component Side w8: R8.2 v1(3600,2931.73) ; v1(4400,2800) pad.6
  Solder Side w8: v1(3600,2931.73) 3608.27,2931.73 3616.54,2940 3800,2940 3801.87,2938.13 3801.87,2853.64 3840.5,2815 3875,2815 3890,2830 3966.09,2830 3970.5,2825.59 3999.5,2825.59 4003.91,2830 4065,2830 4075,2820 4230,2820 4270,2780 4380,2780 v1(4400,2800)
REDLED: R8.1 U1.23 | length 63
  Component Side w8: R8.1 3590,2881.72 3600.63,2871.09 U1.23
RST: C11.2 R7.1 U1.12 | length 253.8
  Component Side w8: U1.12 3767.13,2747.13 v1(3770,2750)
  Solder Side w8: R7.1 C11.2 3653.27,2708.27 3695,2750 v1(3770,2750)
RXD: D1.1 R16.1 U3.9 | length 691.8
  Component Side w8: v1(3990,2735) 4010.5,2735 4035.5,2760 4156.28,2760 4156.72,2759.56 4173.28,2759.56 4173.41,2759.69 4225,2708.11 v1(4225,2610)
  Solder Side w8: D1.1 v1(3990,2735) ; v1(4225,2610) 4280,2610 ; 4280,2596.4 4280,2618.28 4326.72,2665 4350,2665 4360,2675 4360,2705 4373.27,2718.27 R16.1 ; U3.9 4280.31,2594.69
SCL: P2.1 R3.1 U1.13 U6.6 | length 722.3
  Component Side w8: U1.13 3751.62,2762.87 3763.74,2775 3970.5,2775 3975.5,2770 4024.29,2770 4029.82,2775.54 4145.97,2775.54 4150,2779.56 v1(4165,2779.56) ; R3.1 4125,2615 4140.07,2599.93 P2.1
  Solder Side w8: v1(4125,2655) 4125,2651.72 4140.09,2666.81 4140.09,2701.81 4155,2716.72 4155,2722.55 4165,2732.55 v1@4165,2779.84 ; U6.6 4136.97,2779.56 v1(4165,2779.56)
SDA: P2.2 R4.1 U1.14 U6.5 | length 784.3
  Component Side w8: U1.14 3745.77,2778.62 3752.15,2785 3752.53,2785 3757.53,2790 3976.72,2790 3981.72,2785 4018.08,2785 4023.61,2790.54 4139.76,2790.54 4148.79,2799.56 4173.28,2799.56 4190,2782.85 v1(4190,2780) ; v1(4180,2655) R4.1 4180,2600 4190.07,2589.93 P2.2
  Solder Side w8: U6.5 4137.01,2799.84 4175.16,2799.84 4190,2785 4190,2726.96 4171.64,2708.6 4171.64,2663.36 v1(4180,2655)
SEL: Q1.3 R11.2 U2.1 | length 678.6
  Component Side w8: U2.1 3869.37,2674.37 v1(3895,2700)
  Solder Side w8: Q1.3 3499.5,2884.29 3499.55,2884.24 3575.76,2884.24 3605,2855 3605,2830 3611.73,2823.27 R11.2 3611.73,2773.27 3615,2770 3885,2770 3895,2760 v1(3895,2700)
SPSTEMP: P1.2 U1.4 | length 113.3
  Component Side w8: P1.2 3625.07,2620.07 3632.13,2627.13 U1.4
SWCLK: pad.7 U1.19 | length 105.8
  Component Side w7: U1.19 3664,2840.02 3664,2864 3664.87,2864.87 3664.87,2900.49 3665.49,2900.49 3685,2920 pad.7 pad.7@3695,2930
SWDIO: pad.8 U1.20 | length 91.2
  Component Side w7: U1.20 3647.87,2862.87 3650,2865 pad.8
TSENEN: pad.0 U1.29 | length 51.2
  Component Side w8: pad.0 3530,2745 3532.13,2747.13 U1.29
TXD: D2.2 U3.8 | length 557.2
  Component Side w8: D2.2 3971.46,2715 4011.72,2715 4041.72,2745 4150.07,2745 4150.5,2744.56 4167.33,2744.56 4205,2706.89 4205,2601.72 4226.72,2580 4275,2580 v1(4300,2605)
  Solder Side w8: U3.8 v1(4300,2605)
UART_MISO: D1.2 U1.5 | length 352.6
  Component Side w8: U1.5 3648.62,2669.61 3648.62,2633.95 3660,2622.57 v1(3660,2615)
  Solder Side w8: v1(3660,2615) 3660,2690 3700,2730 3785,2730 3788.27,2733.27 3856.81,2733.27 D1.2
UART_MOSI: D2.1 U1.6 | length 349.2
  Component Side w8: U1.6 3663.62,2640.16 3688.79,2615 v1(3690,2615) ; v1(3858.54,2700) D2.1
  Solder Side w8: v1(3690,2615) 3690,2680 3705,2695 3794.98,2695 3796.72,2693.27 3858.54,2693.27 v1(3858.54,2700)
UARTUSB_N: U2.8 U3.2 | length 568
  Component Side w8: v1(3920,2645) 3925,2645 3935,2635 U2.8
  Solder Side w8: v1(3920,2645) 3925,2650 4015,2650 4015,2635.5 4045.5,2605 4186.21,2605 4216.21,2635 4266.21,2635 4277.97,2646.76 4277.97,2699.68 4280.31,2702.02 U3.2
UARTUSB_P: U2.2 U3.1 | length 575.6
  Component Side w8: U2.2 3817.4,2655 3875,2655 3890,2670 v1(3920,2670)
  Solder Side w8: v1(3920,2670) 3925,2665 4021.21,2665 4030,2656.21 4030,2641.72 4051.72,2620 4180,2620 4210,2650 4260,2650 4262.97,2652.97 4262.97,2699.68 4260.63,2702.02 U3.1
USB_N: J1.A7 J1.B7 U2.6 | length 398
  Component Side w8: v1(3925,2385) 3915,2395 3915,2436.21 3895.23,2455.98 v1(3895.23,2529.77) 3895.23,2590.23 3900.63,2595.63 U2.6
  Solder Side w8: J1.B7 v1(3895.23,2529.77) ; J1.A7 3914.91,2395.09 v1(3925,2385)
USB_P: J1.A6 J1.B6 U2.4 | length 428.8
  Component Side w8: U2.4 3854.68,2615.32 3880.23,2589.77 3880.23,2547.79 ; 3880.21,2511.77 3880.21,2512.68 3880.14,2512.75 3880.14,2513.56 3880.03,2513.68 3880.03,2514.39 3879.86,2514.55 3879.86,2515.14 3875.23,2519.77 3875.23,2540.23 3879.86,2544.86 3879.86,2544.98 3880.03,2545.15 3880.03,2545.86 3880.14,2545.98 3880.14,2546.79 3880.21,2546.86 3880.21,2547.76 ; 3880.23,2511.75 3880.23,2449.77 3900,2430 3900,2395 v1(3890,2385)
  Solder Side w8: v1(3890,2385) 3899.91,2394.91 3899.91,2401.39 3899.89,2402.91 3899.63,2403.18 3899.63,2405.37 3895.23,2409.77 J1.A6 3895.23,2460.23 3900,2465 3910,2465 3914.91,2469.91 J1.B6
V33A: C2.2 D3.1 R16.2 VR1.2 | length 452.9
  Component Side w8: VR1.2 4262.6,2662.6 4269.69,2669.68 C2.2 ; C2.2@4270,2700.32 4270,2735 4285,2750 v1(4365,2750) ; D3.1 4395,2650 4415,2670 v1(4435,2670)
  Solder Side w8: v1(4365,2750) 4445,2750 4455,2740 4455,2690 v1(4435,2670)
XTALIN: C10.2 R6.2 U1.16 Y1.3 | length 137.7
  Component Side w8: U1.16 3750.12,2810.12 3758.27,2818.27 R6.2 ; v1@3798.27,2818.27 C10.2
  Component Side w18: R6.2 3798.27,2818.27 v1(3800,2820)
  Solder Side w20: Y1.3@3779.9,2823.5 3783.41,2820 v1(3800,2820)
XTALOUT: C9.2 R6.1 U1.17 Y1.1 | length 207
  Component Side w8: U1.17 3695.12,2870.12 v1@3710,2885 ; v1(3710,2880) 3715,2880 3725,2870 3748.27,2870 ; C9.2 3748.27,2870 ; R6.1 3758.27,2851.73 3748.27,2861.73 3748.27,2870
  Solder Side w20: Y1.1@3678.19,2885 3683.19,2880 v1(3710,2880)
pads on no net: J1.0 J1.A8 J1.B8 U1.15 U1.22 U1.28 U1.30 U3.4 U3.6 U5.1 Y1.2 Y1.4

## Polygon pours and split planes (outlines as drawn)
GND on Component Side "Component Side-No Net 1" (solid, remove dead copper, pour order 61): 3405,2985 3416.54,2973.46 3416.54,2878.29 3676.71,2878.29 3680,2875 3690,2885 3690,2995 3690,2990
GND on Component Side "Component Side-No Net 1" (solid, remove dead copper, pour order 53): 3775.15,2447.28 3787.43,2435 3935,2435 3935,2426.24 3947.2,2414.03 3947.42,2414.25 4005.56,2414.25 4039.25,2414.25 4040,2415 4045,2410 4045,2345 4045,2285 4030,2270 4015,2255 3695,2255 3695,2443.69 3701.31,2450
GND on Component Side "Component Side-No Net 1" (solid, remove dead copper, pour order 51): 4060,2440 4057.32,2437.32 4057.32,2398.27 4150.04,2398.27 4160,2388.3 4180.7,2409 4180.7,2425.7 4185,2430 4190.07,2435.07 4190.07,2443.08
A3V3 on Component Side "Component Side-No Net 1" (solid, remove dead copper, pour order 49): 3480,2585 3487.22,2577.78 3528.81,2577.78 3528.81,2680.08 3520,2680.08 3520,2715 3505,2715 3470,2715 3465,2710 3465,2595
GND on Component Side "Component Side-No Net 1" (solid, remove dead copper, pour order 34): 4285,2750 4285,2669.45 4281.26,2665.71 4281.97,2665 4370,2665 4370,2728.09 4385.05,2743.14 4376.54,2751.65 4376.54,2761.54 4285.32,2761.54 4285,2761.22
GND on Component Side "Component Side-No Net 1" (solid, remove dead copper, pour order 25): 4360,3010 4580,3010 4660,2930 4680,2910 4680,2295 3655,2295 3620,2260 3580,2300 3295,2300 3295,3030 3305,3040 3310,3035 3455,3035
GND on Component Side "Component Side-No Net 1" (solid, remove dead copper, pour order 43): 3935,2410 3935,2330 3940,2325 4110,2325 4110,2390 4080,2420 4075,2415 3975,2415 3935,2415
GND on Component Side "Component Side-No Net 1" (solid, remove dead copper, pour order 41): 3771,2451.44 3777.43,2445 3885,2445 3885,2350 3895,2340 3870,2315 3760,2315 3745,2315 3735,2325 3747.77,2337.77 3747.77,2445.82
GND on Component Side "Component Side-No Net 1" (solid, remove dead copper, pour order 40): 4092.8,2481.46 4060,2481.46 4057.32,2378.27 4173.27,2378.27 4226,2431 4235,2440 4237.7,2520 4095,2520
GND on Component Side "Component Side-No Net 1" (solid, remove dead copper, pour order 39): 4055,2455 4055,2385.51 4057.36,2383.16 4064.55,2375.96 4175.58,2375.96 4188.26,2375.96 4247.43,2435.13 4252.24,2439.93 4252.24,2487.29 4252.24,2487.76 4245,2495 4243.28,2496.72 4243.28,2525.58 4095.58,2525.58 4090,2520 4092.8,2517.2 4092.8,2481.46 4058.54,2481.46 4055,2485
3V3 on Component Side "Component Side-No Net 1" (solid, remove dead copper, pour order 37): 3512.36,2895 3595,2895 3605,2885 3600,2880 3600,2830 3600,2820 3580,2820 3570,2810 3525,2810 3515,2810 3510,2815 3510,2870
GND on Component Side "Component Side-No Net 1" (solid, remove dead copper, pour order 23): 3335,3060 3365,3030 3940,3030 3940,2755 3935,2760 3340,2760 3335,2760
GND on Component Side "Component Side-No Net 1" (solid, remove dead copper, pour order 26): 3245,3075 3260,3090 4615,3090 4615,2320 4510,2215 4500,2205 3250,2205
V33A on Component Side "Component Side-No Net 1" (solid, remove dead copper, pour order 35): 4236.22,2675 4226.72,2665.5 4226.72,2580 4275,2580 4295.43,2600.43 4315.41,2600.43 4315.41,2674.59 4315,2675 4310,2680 4310,2735 4250,2735 4235,2750
3V3 on Component Side "Component Side-No Net 1" (solid, remove dead copper, pour order 42): 4100,2750 4213.69,2750 4228.76,2734.93 4225,2731.17 4225,2630 4225,2570 4235,2560 4230,2555 4105,2555
GND on Component Side "Component Side-No Net 1" (solid, remove dead copper, pour order 44): 3570,2620 3575,2615 3730,2615 3730,2425 3725,2420 3700,2395 3580,2395 3565,2395 3560,2400 3525,2435 3510,2435
GND on Component Side "Component Side-No Net 1" (solid, remove dead copper, pour order 24): 3527.8,2685 3585,2685 3590,2680 3590,2627.43 3509.04,2627.43 3499.06,2617.45 3477.02,2639.48 3477.02,2686.66
GND on Solder Side "Component Side-No Net 1" (solid, remove dead copper, pour order 59): 3997.44,2515.74 3990,2523.17 3990,2550 3965,2550 3967.19,2547.81 3967.19,2505.06 3997.44,2505.06
GND on Solder Side "Component Side-No Net 1" (solid, remove dead copper, pour order 57): 3757.35,2525.67 4051.14,2525.67 4058.16,2532.69 4055,2535.85 4055,2595 3750,2595 3726.31,2595 3726.31,2521.31 3725,2520
GND on Solder Side "Component Side-No Net 1" (solid, remove dead copper, pour order 55): 3949.28,2403.94 3950.34,2405 4070,2405 4070,2310 4080,2300 4060,2280 3710,2280 3710,2395 3720,2405
GND on Solder Side "Component Side-No Net 1" (solid, remove dead copper, pour order 29): 3845,3075 3845,2195 3890,2150 3915,2175 4790,2175 4790,2910 4885,3005 4825,3065 4825,3130
GND on Solder Side "Component Side-No Net 1" (solid, remove dead copper, pour order 33): 3578.27,2807.56 3592.68,2793.15 3592.68,2716.27 3723.73,2716.27 3725,2715 3745,2735 3745,2790 3745,2830 3740,2835
GND on Solder Side "Component Side-No Net 1" (solid, remove dead copper, pour order 28): 3270,3165 4640,3165 4680,3125 4675,3120 4675,2360 4585,2360 4425,2200 3300,2200 3295,2205 3235,2205
3V3 on Solder Side "Component Side-No Net 1" (solid, remove dead copper, pour order 31): 3660,2690 3700,2730 3705,2735 3875,2735 3875,2680 3795,2600 3735,2600 3630.85,2600 3629.61,2601.24 3620,2610.85 3620,2690
GND on Solder Side "Component Side-No Net 1" (solid, remove dead copper, pour order 36): 4045,2830 4045,2698.69 4040.07,2693.76 4046.12,2687.71 4109.41,2687.71 4109.41,2625.59 4135,2600 4145,2610 4225,2610 4225,2750 4260,2785 4260,2825 4260,2845
GND on Solder Side "Component Side-No Net 1" (solid, remove dead copper, pour order 38): 4045,2795 4045,2711.17 4040.07,2706.24 4057.85,2688.46 4082.72,2688.46 4108.65,2688.46 4109.41,2687.71 4110,2688.3 4110,2785 4110,2795
GND on Solder Side "Component Side-No Net 1" (solid, remove dead copper, pour order 27): 3530,2725 3533.57,2721.43 3533.57,2566.3 3711.3,2566.3 3715,2570 3725,2580 3725,2720
GND on Solder Side "Component Side-No Net 1" (solid, remove dead copper, pour order 30): 3585.51,2782.24 3597.75,2770 3735,2770 3765,2770 3775,2760 3760,2745 3760,2730 3679,2730 3653.27,2704.27 3649.27,2708.27 3580,2708.27
GND on Solder Side "Component Side-No Net 1" (solid, remove dead copper, pour order 32): 3980,2825.59 4154.41,2825.59 4160,2820 4160,2705 3965,2705 3960,2710 3920,2750 3920,2830
GND on Top Overlay "Component Side-No Net 1" (solid): 3570,2670.35 3555.35,2670.35 3555.35,2685
GND on Ground Plane (split plane): 3829.98,2900 3830.36,2896.08 3831.51,2892.31 3833.36,2888.83 3835.86,2885.79 3838.91,2883.29 3842.38,2881.43 3846.15,2880.29 3850.07,2879.9 4505.52,2879.9 4505.27,2866.46 4504.11,2845.74 4502.17,2825.09 4499.46,2804.52 4495.99,2784.06 4491.75,2763.75 4486.76,2743.61 4481.01,2723.67 4474.53,2703.97 4467.31,2684.51 4459.37,2665.34 4450.72,2646.49 4441.37,2627.96 4431.33,2609.8 4420.62,2592.03 4409.26,2574.67 4397.25,2557.75 4384.62,2541.29 4371.38,2525.32 4357.56,2509.84 4343.16,2494.9 4328.22,2480.51 4312.75,2466.68 4296.77,2453.44 4280.31,2440.81 4263.39,2428.81 4246.03,2417.44 4228.26,2406.73 4210.1,2396.7 4191.58,2387.35 4172.72,2378.7 4153.55,2370.76 4134.1,2363.54 4114.39,2357.05 4094.45,2351.31 4074.31,2346.31 4054,2342.08 4033.55,2338.6 4012.98,2335.89 3992.32,2333.96 3971.6,2332.79 3950.86,2332.4 3930.11,2332.79 3909.4,2333.96 3888.74,2335.89 3868.17,2338.6 3847.72,2342.08 3827.4,2346.31 3807.27,2351.31 3787.33,2357.05 3767.62,2363.54 3748.17,2370.76 3729,2378.7 3710.14,2387.35 3691.62,2396.7 3673.46,2406.73 3655.69,2417.44 3638.33,2428.81 3621.41,2440.81 3604.95,2453.44 3588.97,2466.68 3573.5,2480.51 3558.56,2494.9 3544.16,2509.84 3530.34,2525.32 3517.1,2541.29 3504.47,2557.75 3492.46,2574.67 3481.1,2592.03 3470.39,2609.8 3460.35,2627.96 3451,2646.49 3442.35,2665.34 3434.41,2684.51 3427.19,2703.97 3420.71,2723.67 3414.96,2743.61 3409.97,2763.75 3405.73,2784.06 3402.26,2804.52 3399.55,2825.09 3397.61,2845.74 3396.45,2866.46 3396.06,2887.2 3396.1,2889.39 3396.15,2889.9 3396.16,2889.99 3396.16,2964.9 3829.98,2964.9
5V on Power Plane (split plane): 4394.9,2722.89 4394.9,2710 4395.29,2708.05 4396.4,2706.4 4411.4,2691.4 4413.05,2690.29 4415,2689.9 4469.31,2689.9 4467.31,2684.51 4459.37,2665.34 4450.72,2646.49 4441.37,2627.96 4431.33,2609.8 4420.62,2592.03 4409.26,2574.67 4397.25,2557.75 4384.62,2541.29 4371.38,2525.32 4357.56,2509.84 4343.16,2494.9 4328.22,2480.51 4314.04,2467.84 4305.1,2476.78 4305.1,2712.89 4317.11,2724.9 4392.89,2724.9
NetD4_2 on Power Plane (split plane): 4300.29,2722.5 4296.4,2718.6 4295.29,2716.95 4294.9,2715 4294.9,2474.67 4295.29,2472.72 4296.4,2471.07 4306.2,2461.26 4296.77,2453.44 4280.31,2440.81 4263.39,2428.81 4246.03,2417.44 4228.26,2406.73 4210.1,2396.7 4191.58,2387.35 4172.72,2378.7 4153.55,2370.76 4134.1,2363.54 4115.1,2357.29 4115.1,2426.96 4227.06,2426.96 4229.01,2427.35 4230.67,2428.46 4253.6,2451.4 4254.71,2453.05 4255.1,2455 4255.1,2557.89 4258.6,2561.4 4259.71,2563.05 4260.1,2565 4260.1,2710 4259.71,2711.95 4258.6,2713.6 4243.6,2728.6 4241.95,2729.71 4240,2730.1 4217.11,2730.1 4210.1,2737.11 4210.1,2762.89 4217.11,2769.9 4252.89,2769.9
5V on Power Plane (split plane): 4109.9,2722.89 4109.9,2690 4110.29,2688.05 4111.4,2686.4 4119.9,2677.89 4119.9,2610 4119.9,2537.11 4106.4,2523.6 4105.29,2521.95 4104.9,2520 4104.9,2354.32 4094.45,2351.31 4074.31,2346.31 4054,2342.08 4033.55,2338.6 4012.98,2335.89 3992.32,2333.96 3971.6,2332.79 3950.86,2332.4 3930.11,2332.79 3909.4,2333.96 3888.74,2335.89 3868.17,2338.6 3847.72,2342.08 3827.4,2346.31 3807.27,2351.31 3787.33,2357.05 3775.1,2361.08 3775.1,2492.89 3792.11,2509.9 3915,2509.9 3916.95,2510.29 3918.6,2511.4 3947.11,2539.9 4085,2539.9 4086.95,2540.29 4088.6,2541.4 4098.6,2551.4 4099.71,2553.05 4100.1,2555 4100.1,2665 4099.71,2666.95 4098.6,2668.6 4080.1,2687.11 4080.1,2715 4080.1,2729.9 4102.89,2729.9
KEYI on Power Plane (split plane): 3850.07,2879.9 3999.8,2879.9 3999.8,2845.1 3920,2845.1 3918.05,2844.71 3916.4,2843.6 3892.89,2820.1 3827.11,2820.1 3808.6,2838.6 3806.95,2839.71 3805,2840.1 3765,2840.1 3763.05,2839.71 3761.4,2838.6 3722.89,2800.1 3522.11,2800.1 3495.1,2827.11 3495.1,2847.89 3502.11,2854.9 3512.89,2854.9 3541.4,2826.4 3543.05,2825.29 3545,2824.9 3705,2824.9 3706.95,2825.29 3708.6,2826.4 3747.11,2864.9 3825,2864.9 3826.95,2865.29 3828.6,2866.4 3829.71,2868.05 3830.1,2870 3830.1,2880 3849.09,2880
DCDCEN on Power Plane (split plane): 3516.4,2791.4 3518.05,2790.29 3520,2789.9 3569.9,2789.9 3569.9,2775 3570.29,2773.05 3571.4,2771.4 3584.9,2757.89 3584.9,2705 3585.29,2703.05 3586.4,2701.4 3639.9,2647.89 3639.9,2615 3640.29,2613.05 3641.4,2611.4 3643.05,2610.29 3645,2609.9 3672.89,2609.9 3694.9,2587.89 3694.9,2540.1 3662.11,2540.1 3655.1,2547.11 3655.1,2570 3654.71,2571.95 3653.6,2573.6 3643.61,2583.6 3643.6,2583.6 3620.1,2607.11 3620.1,2640 3619.71,2641.95 3618.6,2643.6 3570.1,2692.11 3570.1,2745 3569.71,2746.95 3568.6,2748.6 3553.6,2763.6 3551.95,2764.71 3550,2765.1 3507.11,2765.1 3495.1,2777.11 3495.1,2792.89 3505,2802.79
3V3 on Power Plane (split plane): 217 vertices, not listed, extent 3396.06,2364.55 4505.52,2964.9

## Keep-outs
Keep-Out Layer:
  the board outline again, w10

## Other copper
Ground Plane (plane layer: these items are gaps in the copper):
  rectangle: 4140.07,2520 4190.07,2570
  rectangle: 3600,2485 3700,2585
Power Plane (plane layer: these items are gaps in the copper):
  rectangle: 3612.79,2590 3622.79,2600
  rectangle: 3630,2545 3650,2575
  rectangle: 3620,2560 3640,2580
  rectangle: 3620,2560 3635,2590
  rectangle: 3595,2557.75 3620,2600
  rectangle: 3595,2535 3650,2570
  rectangle: 4110,2455 4250,2500
  rectangle: 4215,2435 4230,2440
  rectangle: 4220,2440 4235,2443.53
  rectangle: 4220,2443.53 4238.53,2450
  rectangle: 4220,2450 4250,2460
  rectangle: 4110,2432.06 4227.06,2460
  rectangle: 4125,2432.06 4165,2540
  rectangle: 4115,2510 4120,2525
  rectangle: 4120,2510 4130.1,2535
  rectangle: 4110,2455 4130,2520
  rectangle: 3821.4,2880 3865,2908.6
  rectangle: 3595,2480 3705,2535
  rectangle: 3630,2525 3650,2545
  rectangle: 3630,2529.9 3660,2541.29
  lines w10: 3505,2810 3490,2795 3490,2775 3505,2760 3550,2760 3565,2745 3565,2690 3615,2640 3615,2605 3640,2580 3650,2570 3650,2545 3660,2535 3700,2535 3700,2590 3675,2615 3645,2615 3645,2650 3590,2705 3590,2760 3575,2775 3575,2795 ; 3770,2355 3770,2495 3790,2515 3915,2515 3945,2545 4085,2545 4095,2555 4095,2665 4075,2685 4075,2715 4075,2735 4105,2735 4115,2725 4115,2690 4125,2680 4125,2610 4125,2535 4110,2520 4110,2330 ; 3835,2905 3825,2905 3825,2870 3745,2870 3705,2830 3545,2830 3515,2860 3500,2860 3490,2850 3490,2825 3520,2795 3725,2795 3765,2835 3805,2835 3825,2815 3855,2815 3895,2815 3920,2840 4004.9,2840 4004.9,2885 4020,2885 ; 4115.1,2432.06 4227.06,2432.06 4250,2455 4250,2560 4255,2565 4255,2710 4240,2725 4215,2725 4205,2735 4205,2765 4215,2775 4255,2775 4305,2725 4310,2725 ; 4321.89,2452.78 4300,2474.67 4300,2715 4315,2730 4395,2730 4400,2725 4400,2710 4415,2695 4480,2695 ; 4485,2730 4500,2745

## Silkscreen, mask and mechanical layers (free items; w line width, h text height)
Top Overlay:
  drawing of 9 lines, arcs and shapes, not listed
  text "DBG" at 3625,2880 h50
  text "Gr" at 4445,2795 h60 r270
  text "G" at 3535,2770 h60 r90
  text "K" at 4245,2755 h60
  text "G" at 4310,2755 h60
  text "R" at 4385,2755 h60
  text "DiffTorch" at 4045,2730 h60
  text "NTC" at 3440,2720 h60 r270
  text "V1.1" at 3690,2415 h78.74
  text "Powered by:" at 3885,2350 h60 r90
  text "FlashLightOS" at 3930,2335 h60 r90
Bottom Overlay:
  rectangle: 3889.25,2711.38 3899.88,2758.62
  rectangle: 4160.98,2664.08 4171.61,2711.33
  rectangle: 3990,2720 4005,2735
  text "Xtern Ripper V3.0" at 4492.73,2837.2 h80
  text "redstoner_35" at 4405,2785 h60
  text "By:" at 4480,2785 h60
  text "Config" at 3995,2780 h60
  text "JLCJLCJLCJLC" at 4105,2620 h80
  text "USB" at 3955,2545 h60
Top Solder:
  text "TMCU" at 3725,2935 h60